# Altium PCB PCB_DC_Adapterplatine.PcbDoc
Units mm, origin at the board's own origin, x right, y up, seen from the top; angles counter-clockwise.
Board outline 70.5 x 177.5 mm, 2 copper layers (Top Copper, Bottom Copper), stack 1.64 mm thick; 70 components, 33 nets, 207 pads, 58 vias.
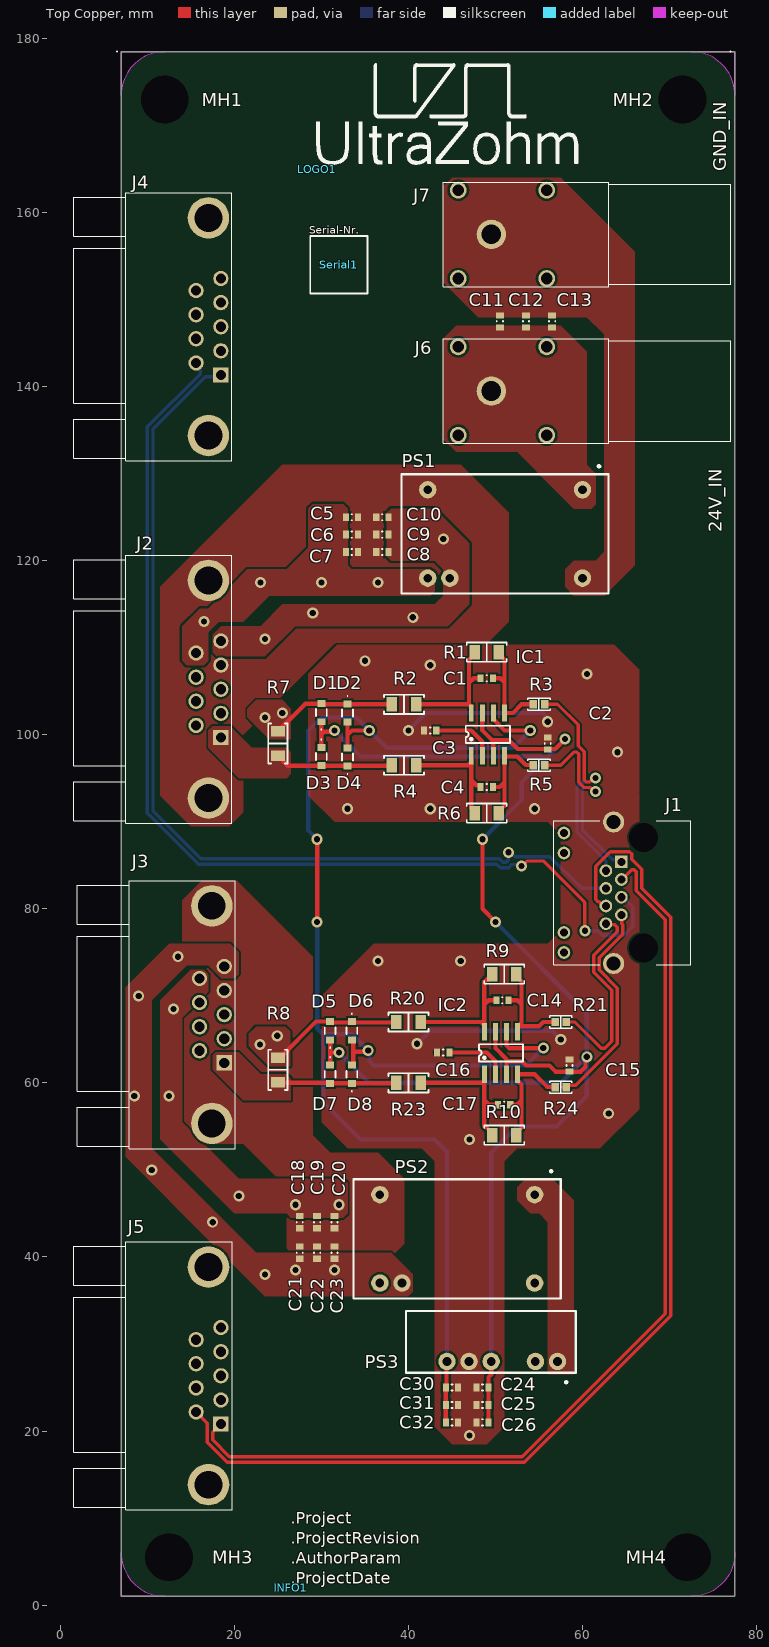
[diagram p0: Top Copper view]
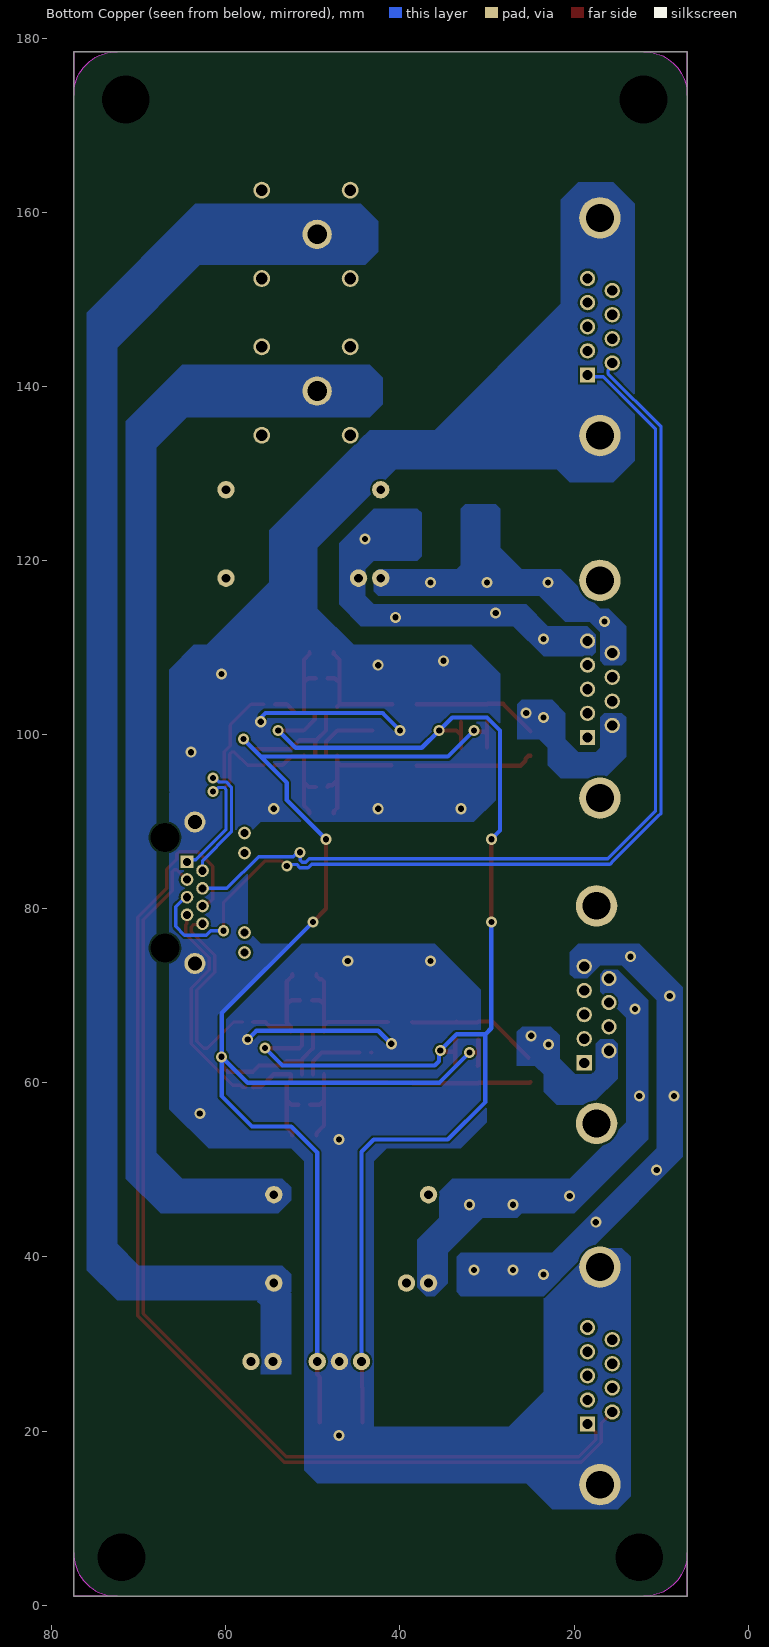
[diagram p1: Bottom Copper view, seen from below]

## Layer stack, top to bottom
Top Mask: solder mask 0.015, Solder Resist, Dk 3.8
Top Copper: signal copper 0.07
Core: core 1.5, FR-4, Dk 4.5
Bottom Copper: signal copper 0.07
Bottom Mask: solder mask 0.015, Solder Resist, Dk 3.8

## Board outline
7,1 77.5,1 77.5,178.5 7,178.5
cut-out: 77.5,173.5 ccw(c72.5,173.5) 72.5,178.5 77.5,178.5
cut-out: 7,178.5 12,178.5 ccw(c12,173.5) 7,173.5
cut-out: 7,1 7,6 ccw(c12,6) 12,1
cut-out: 72.5,1 77.5,1 77.5,6 cw(c72.5,6)

## Design rules (kind name [scope] priority, off if disabled: settings)
Clearance [All] p1: gap=0.254 ignorepadtopadclearanceinfootprint=FALSE except(0: Arc-Hole Track-Hole SMDPad-Hole THPad-Hole Via-Hole Fill-Hole Poly-Hole Region-Hole Text-Hole)
DiffPairsRouting [All] p1: maxlimit=0.254 minlimit=0.254 mostfreqgap=0.254 toplayer_minwidth=0.381 toplayer_maxwidth=0.381 toplayer_prefwidth=0.381 bottomlayer_minwidth=0.381 bottomlayer_maxwidth=0.381 bottomlayer_prefwidth=0.381 maxuncoupledlength=12.7
HoleSize [All] p1: absolutevalues=TRUE maxlimit=6.3 minlimit=0.15 maxpercent=80.000 minpercent=20.000
HoleToHoleClearance [All] p1: gap=0.5 allowstackedmicrovias=TRUE
PlaneConnect [All] p1: planeconnectstyle=Direct reliefexpansion=0.508 reliefentries=4 reliefconductorwidth=0.254 reliefairgap=0
PolygonConnect [All] p1: connectstyle=Direct reliefconductorwidth=0.254 reliefentries=4 polygonreliefangle="90 Angle" airgapwidth=0.254
RoutingVias [All] p1: holewidth=0.711 width=1.27 viastyle="Through Hole" minholewidth=0.711 minwidth=1.27 maxholewidth=0.711 maxwidth=1.27
SilkToSolderMaskClearance [IsPad] p1: minsilkscreentomaskgap=0.1 clearancetoexposedcopper=FALSE
SolderMaskExpansion [All] p1: expansion=0 istentingtop=FALSE
Width [All] p1: maxlimit=1.5 minlimit=0.254 preferedwidth=0.5
25 further rules are at their usual default settings.

## Classes and differential pairs
component class TopSheet: INFO1 J1 J2 J3 J4 J5 LOGO1 MH1 MH2 MH3 MH4 Serial1
component class "Signal Conditioning": C14 C15 C16 C17 D5 D6 D7 D8 IC2 R8 R9 R10 R20 R21 R23 R24
component class "Power Supply": C5 C6 C7 C8 C9 C10 C11 C12 C13 C18 C19 C20 C21 C22 C23 J6 J7 PS1 PS2
differential pair V_DSUB_3: +V_DSUB_3_P -V_DSUB_3_N
differential pair V_Spannung: +V_Spannung_P -V_Spannung_N
differential pair V_Strom_2: +V_Strom_2_P -V_Strom_2_N
differential pair V_Strom_1: +V_Strom_1_P -V_Strom_1_N

## Components (designator, comment, footprint, x,y, rotation, side; value= is the part's Value field where it differs from the comment)
C1 "1 pF" C_0603 48.993,106.5 r0 top
C2 "100 nF" C_0603 55.993,99 r90 top
C3 "1 µF" C_0603 42.493,100.5 r0 top
C4 "1 pF" C_0603 48.993,94 r0 top
C5 "1 µF" C_0603 33.5,125 r180 top
C6 "1 µF" C_0603 33.5,123 r180 top
C7 "1 µF" C_0603 33.5,121 r180 top
C8 "1 µF" C_0603 37,121 r180 top
C9 "1 µF" C_0603 37,123 r180 top
C10 "1 µF" C_0603 37,125 r180 top
C11 "1 µF" C_0603 50.5,147.5 r90 top
C12 "1 µF" C_0603 53.5,147.5 r90 top
C13 "1 µF" C_0603 56.5,147.5 r90 top
C14 "1 pF" C_0603 50.793,69.5 r0 top
C15 "100 nF" C_0603 58.493,62 r90 top
C16 "1 µF" C_0603 43.993,63.5 r0 top
C17 "1 pF" C_0603 50.993,57.5 r0 top
C18 "1 µF" C_0603 27.5,44 r90 top
C19 "1 µF" C_0603 29.5,44 r90 top
C20 "1 µF" C_0603 31.5,44 r90 top
C21 "1 µF" C_0603 27.5,40.5 r90 top
C22 "1 µF" C_0603 29.5,40.5 r90 top
C23 "1 µF" C_0603 31.5,40.5 r90 top
C24 "1 µF" C_0603 48.5,25 r0 top
C25 "1 µF" C_0603 48.5,23 r0 top
C26 "1 µF" C_0603 48.5,21 r0 top
C30 "1 µF" C_0603 45,25 r0 top
C31 "1 µF" C_0603 45,23 r0 top
C32 "1 µF" C_0603 45,21 r0 top
D1 "1SS356VMFHTE-17" 1SS356VMFHTE17 29.993,102.55 r180 top
D2 "1SS356VMFHTE-17" 1SS356VMFHTE17 32.993,102.5 r0 top
D3 "1SS356VMFHTE-17" 1SS356VMFHTE17 29.993,97.5 r0 top
D4 "1SS356VMFHTE-17" 1SS356VMFHTE17 32.993,97.45 r180 top
D5 "1SS356VMFHTE-17" 1SS356VMFHTE17 31,66 r180 top
D6 "1SS356VMFHTE-17" 1SS356VMFHTE17 33.5,66 r0 top
D7 "1SS356VMFHTE-17" 1SS356VMFHTE17 31,61 r0 top
D8 "1SS356VMFHTE-17" 1SS356VMFHTE17 33.5,61 r180 top
IC1 "ADA4940-1ARZ-R7" SOIC-8-N 47.223,97.6 r90 top value="differential ADC driver"
IC2 "ADA4940-1ARZ-R7" SOIC-8-N 48.723,61 r90 top value="differential ADC driver"
INFO1 "Design Information" Design_info 26.5,2 r0 top
J1 "RJHSE-5381" RJHSE-5381 72.589,73.849 r90 top
J2 "2311765-2" 23117652 18.44,99.695 r270 top
J3 "2311765-2" 23117652 18.833,62.305 r270 top
J4 "2311765-2" 23117652 18.44,141.345 r270 top
J5 "2311765-2" 23117652 18.442,20.805 r270 top
J6 "FCR7350R, PCB mount 4mm jack, RED" FCR7350 60.5,139.5 r0 top value="PCB mount 4mm jack, Red FCR7350R, 1000V, 24A"
J7 "FCR7350B, PCB mount 4mm jack, BLACK" FCR7350 60.5,157.5 r0 top value="PCB mount 4mm jack, Black	FCR7350B, 1000V, 24A"
LOGO1 "UZ Logo" UZ_Logo_small 29.5,165 r0 top value=Logo
MH1 "Mounting_Hole_M5" "Mounting Hole (M5)" 12,173 r0 top
MH2 "Mounting_Hole_M5" "Mounting Hole (M5)" 71.5,173 r0 top
MH3 "Mounting_Hole_M5" "Mounting Hole (M5)" 12.5,5.5 r0 top
MH4 "Mounting_Hole_M5" "Mounting Hole (M5)" 72,5.5 r0 top
PS1 "TEL 12-2423" "TEL 12-2423" 62.993,129.93 r180 top
PS2 "TEL 12-2423" "TEL 12-2423" 57.493,48.93 r180 top
PS3 "TMA 2405D" "TMA 2405D" 59.22,26.7 r180 top
R1 "2k 0.1%" "RES 1206_3216" 48.993,109.5 r0 top value=2k
R2 "1k 0.1%" "RES 1206_3216" 39.493,103.5 r0 top value=1k
R3 "49R9" "RES 0603_1608" 54.993,103.5 r0 top
R4 "1k 0.1%" "RES 1206_3216" 39.493,96.5 r0 top value=1k
R5 "49R9" "RES 0603_1608" 54.993,96.5 r0 top
R6 "2k 0.1%" "RES 1206_3216" 48.993,91 r0 top value=2k
R7 "10R" "RES 1206_3216" 25,99 r90 top
R8 "10R" "RES 1206_3216" 25,61.5 r90 top
R9 "2k 0.1%" "RES 1206_3216" 51,72.5 r0 top value=2k
R10 "2k 0.1%" "RES 1206_3216" 51,54 r0 top value=2k
R20 "1k 0.1%" "RES 1206_3216" 39.993,67 r0 top value=1k
R21 "49R9" "RES 0603_1608" 57.493,67 r0 top
R23 "1k 0.1%" "RES 1206_3216" 39.993,60 r0 top value=1k
R24 "49R9" "RES 0603_1608" 57.493,59.5 r0 top
Serial1 "Serialnumber 6.3 x 6.3 mm" SERIAL_6.3X6.3MM 32,154 r0 top value=REV

## Footprints (in the part's own frame and the unit in brackets; to place one, negate y for a bottom-side part, rotate by r counter-clockwise, add the part's x,y. Pads: shape width x height; smd on the part's side, far side on the other; paste and mask are expansions set on the pad)
1SS356VMFHTE17 [mm]
  rect 0.9x0.8 smd: 1(0,1.05) 2(0,-1.05)
  silkscreen extent -0.63,-0.4 0.63,2
23117652 [mm]
  rect 1.755x1.755 hole 1.17: 1(0,0)
  round 1.755 hole 1.17: 2(-2.77,0) 3(-5.54,0) 4(-8.311,0) 5(-11.081,0) 6(-1.385,-2.84) 7(-4.155,-2.84) 8(-6.925,-2.84) 9(-9.695,-2.84)
  round 4.77 hole 3.18: MH1(-18.041,-1.42) MH2(6.96,-1.42)
  silkscreen extent -20.95,-16.92 9.86,1.28, body extent -21.03,-16.93 9.78,1.27, height 12.63
C_0603 [mm] "Chip Capacitor, Body 1.6x0.8mm, Height 1.0mm, IPC High Density"
  rect 0.7x0.9 smd: 1(-0.7,0) 2(0.7,0)
  silkscreen extent -0.05,-0.35 0.05,0.35, body extent -0.87,-0.47 0.88,0.48, height 1
Design_info [mm] "Design information about the PCB"
FCR7350 [mil]
  round 132.87 hole 88.58: 1(-432.22,0)
  round 76.5 hole 53.15: 2(-581.83,200) 3(-581.83,-200) 4(-181.83,-200) 5(-181.83,200)
  silkscreen extent -649,-236 652,236, body extent -648,-236 651,236, height 485
"Mounting Hole (M5)" [mm]
  round 5 hole 5.5: ""(0,0)
"RES 0603_1608" [mm] "Chip Resistor, 2-Leads, Body 1.60x0.80mm, IPC Medium Density"
  rect 0.85x0.95 smd: 1(-0.65,0) 2(0.65,0)
  silkscreen extent -1.27,-0.7 1.27,0.7, body extent -0.8,-0.4 0.8,0.4, height 0.45
"RES 1206_3216" [mm] "Chip Resistor, 2-Leads, Body 3.13x1.55mm, IPC Medium Density"
  rect 1.2x1.65 smd: 1(-1.4,0) 2(1.4,0)
  silkscreen extent -2.3,-1.1 2.3,1.1, body extent -1.6,-0.8 1.6,0.8, height 0.6
RJHSE-5381 [mm] "Ethernet-Steckverbinder R/A RJ45 SHIELDED 8 CONT Y/G LEDS"
  rect 1.462x1.462 hole 0.94: 1(11.552,8.129)
  round 1.462 hole 0.94: 2(10.537,9.909) 3(9.522,8.129) 4(8.507,9.909) 5(7.492,8.129) 6(6.478,9.909) 7(5.462,8.129) 8(4.447,9.909) 9(14.86,14.729) 10(12.569,14.729) 11(3.43,14.729) 12(1.139,14.729)
  round 2.43 hole 1.62: MH1(16.13,9.019) MH2(-0.131,9.019)
  round 1.65 hole 3.3 unplated: MH3(14.35,5.589) MH4(1.65,5.589)
  silkscreen extent -0.26,0.13 16.26,15.88, body extent -0.28,-0.51 16.28,15.93, height 14.74
SERIAL_6.3X6.3MM [mm]
  silkscreen extent -3.3,-3.3 3.3,3.3
SOIC-8-N [mm] "SMD Small Outline IC 8 pin Narrow"
  rect 2x0.55 smd: 1(0,0) 2(0,-1.27) 3(0,-2.54) 4(0,-3.81) 5(4.9,-3.81) 6(4.9,-2.54) 7(4.9,-1.27) 8(4.9,0)
  silkscreen extent 1.46,-4.44 3.44,0.64, body extent -0.64,-4.32 5.56,0.51, height 1.7
"TEL 12-2423" [mm] "Isolierte DC/DC-Wandler – Durchsteckmontage 18-36Vin+/-15V 400mA 12W DIP Iso"
  round 2 hole 1: 1(3,1.77) 8(20.78,1.77) 9(20.78,11.93) 10(18.24,11.93) 16(3,11.93)
  silkscreen extent 0,-0.94 23.8,13.7, body extent 0,0 23.75,13.75, height 8.2
"TMA 2405D" [mm] "Isolierte DC/DC-Wandler – Durchsteckmontage Product Type: DC/DC; Package Style: SIP; Output Power (W): 1; Input Voltage: 24 VDC +/-10%; Output 1 (Vdc): 5; Output 2 (Vdc): -5; Output 3 (Vdc): N/A"
  round 2 hole 1: 1(2.1,-1.3) 2(4.64,-1.3) 4(9.72,-1.3) 5(12.26,-1.3) 6(14.8,-1.3)
  silkscreen extent 0,-7.1 19.5,1.1, body extent 0.08,-7.12 19.5,-0.08, height 11.1
UZ_Logo_small [mm] "logo width 3cm"
  silkscreen extent -0.05,0.57 29.94,12.12

## Part data
C1 C4 C14 C17: library part KGM15ACG1H1R0BT, "Multilayer Ceramic Capacitors MLCC - SMD/SMT 50V 1pF C0G 0603 +/-.1pF", Device Package=0603, Manufacturer="KYOCERA AVX", Operating Temperature="-55 to +125°C", Supplier Part Number 1=581-KGM15ACG1H1R0BT, Tolerance=10%, Voltage Rating="50 VDC", Component Type="Capacitor 0603", ComponentLink1Description=Datasheet, ComponentLink1URL=https://www.mouser.de/datasheet/2/40/C0GNP0_KGM-3216332.pdf, Created from=TGaupp, Created On="13.02.2024 08:51:22", Last Updated="13.02.2024 08:51:22", Live Cycle Status=1, Manufacturer Part Number=KGM15ACG1H1R0BT, Mounting Type=SMD, PartID=147, Series=C0G, Supplier 1=Mouser, Type=Capacitor
C2 C15: library part C0603C104K9PACTU, "Capacitor 0603, 6.3 VDC, 100 nF, X5R", Device Package=0603, Manufacturer=KEMET, Operating Temperature="-55 - 85°C", Supplier Part Number 1=80-C0603C104K9P, Tolerance="10 %", Voltage Rating="6.3 VDC", Component Type="Capacitor 0603", ComponentLink1Description=Datasheet, ComponentLink1URL=https://www.mouser.de/datasheet/2/212/KEM_C1006_X5R_SMD-1103249.pdf, Created from=MGremer, Created On="20.12.2020 13:54:13", Last Updated="20.01.2021 13:57:36", Live Cycle Status=1, Manufacturer Part Number=C0603C104K9PACTU, Mounting Type=SMD, PartID=70, Series="SMD Comm X5R", Stock number="not stored", Supplier 1=Mouser, Type=Capacitor
C3 C5 C6 C7 C8 C9 C10 C11 C12 C13 C16 C18 C19 C20 C21 C22 C23 C24 C25 C26 C30 C31 C32: library part CL10A105KB8NNNC, "50V 1uF X5R ±10% 0603  Multilayer Ceramic Capacitors MLCC - SMD/SMT ROHS", Device Package=0603, LCSC Part Number=C15849, Manufacturer="Samsung Electro-Mechanics", Operating Temperature="-55 - 85°C", Tolerance="10 %", Voltage Rating="50 VDC", Component Type="Capacitor 0603", ComponentLink1Description=Datasheet, ComponentLink1URL=https://datasheet.lcsc.com/lcsc/1810261812_Samsung-Electro-Mechanics-CL10A105KB8NNNC_C15849.pdf, Created from=MGremer, Created On="20.12.2020 13:54:13", Last Updated="28.11.2022 17:23:01", Live Cycle Status=1, Manufacturer Part Number=CL10A105KB8NNNC, Mounting Type=SMD, PartID=5, Series=M, Stock number="Labor SMD Container", Supplier 1=LCSC, Supplier Part Number 1=C15849, Type=Capacitor
D1 D2 D3 D4 D5 D6 D7 D8: "Diode", Manufacturer_Name="ROHM Semiconductor", Mouser Part Number=755-1SS356VMFHTE-17, Datasheet Link=https://fscdn.rohm.com/en/products/databook/datasheet/discrete/diode/switching/1ss355vmfhte-17-e.pdf, Height=0.9mm, Manufacturer_Part_Number=1SS356VMFHTE-17, Mouser Price/Stock=https://www.mouser.co.uk/ProductDetail/ROHM-Semiconductor/1SS356VMFHTE-17?qs=doiCPypUmgG12xHjyvfQdg%3D%3D, Supplier 1=Mouser, Supplier Part Number 1=755-1SS356VMFHTE-17
IC1 IC2: "Differential ADC Driver", Device Package=SOIC-8, Manufacturer="Analog Devices", Operating Temperature="-40 - 105 °C", Package Reference=SOIC-N-8, Supplier Part Number 1=584-ADA4940-1ARZ-R7, Best.-Nr.="Farnell 209-6178", Channels=1, Class I=Analog, Class II="Fully Differential ADC Drivers (-40-125°C)", Component Type=ADC, ComponentLink1Description=Datasheet, ComponentLink1URL=https://www.mouser.de/datasheet/2/609/ADA4940-1_4940-2-878284.pdf, Created from=MGremer, Created On="15.01.2021 12:16:53", Datasheet="DSO11449, Ver. Aug 2000", Last edited="04.01.2007 10:14", Last Updated="22.11.2021 15:19:18", Live Cycle Status=1, Manufacturer Part Number=ADA4940-1ARZ-R7, Mounting Type=SMD, PartID=3, Resolution=-, Stock number="not stored", Supplier 1=Mouser, Type=ADC
INFO1: "Design InformationS", Manufacturer=UltraZohm, Supplier Part Number 1=-, Component Type="Design Information", ComponentLink1Description=https://docs.ultrazohm.com/, ComponentLink1URL=homepage, Created from=MGremer, Created On="03.11.2021 09:04:23", Last Updated="03.11.2021 09:28:34", Live Cycle Status=1, Manufacturer Part Number="Design Information", PartID=12, Supplier 1=-, Type="Design Information"
J1: "Connector Ethernet R/A RJ45 SHIELDED 8 CONT Y/G LEDS"
J2 J3 J4 J5: "Connector D-Sub 9 Pin Female", Manufacturer_Name="TE Connectivity", Mouser Part Number=571-2311765-2, Arrow Part Number=2311765-2, Arrow Price/Stock=https://www.arrow.com/en/products/2311765-2/te-connectivity?region=nac, Datasheet Link=https://www.te.com/commerce/DocumentDelivery/DDEController?Action=showdoc&DocId=Customer+Drawing%7F2311765%7FD%7Fpdf%7FEnglish%7FENG_CD_2311765_D.pdf%7F2311765-2, Height=12.8mm, Manufacturer_Part_Number=2311765-2, Mouser Price/Stock=https://www.mouser.co.uk/ProductDetail/TE-Connectivity/2311765-2?qs=rrS6PyfT74frdzrH7SJRfg%3D%3D
J6: library part FCR7350R, "FCR7350B, 1000V, 24A, RED", Device Package=THT, Manufacturer=Cliff, Operating Temperature="-40°C - 80°C", Supplier Part Number 1=3185-FCR7350R-ND, Component Type="PCB mount 4mm jack, Red", ComponentLink1Description=datasheet, ComponentLink1URL=https://www.cliffuk.co.uk/products/testleads/sockets/S16NPC.pdf, ComponentLink2Description=drawing, ComponentLink2URL=https://media.digikey.com/pdf/Data%20Sheets/Cliff%20Electronic%20LTD%20PDF's/FCR7350_Drawing.pdf, Created from=DHufnagel, Created On="13.06.2022 10:18:11", Last Updated="28.06.2022 13:58:37", Live Cycle Status=1, Manufacturer Part Number=FCR7350R, Minimum Order=1, Mounting Type=THT, PartID=7, Series=S16N-PC, Stock number="not stored", Supplier 1=Digi-Key, Supplier 2=farnell, Supplier Part Number 2=1854508, Type="PCB mount 4mm jack, Red FCR7350R, 1000V, 24A"
J7: library part FCR7350B, "FCR7350B, 1000V, 24A, BLACK", Device Package=THT, Manufacturer=Cliff, Operating Temperature="-40°C - 80°C", Supplier Part Number 1=3185-FCR7350B-ND, Component Type="PCB mount 4mm jack, Black", ComponentLink1Description=datasheet, ComponentLink1URL=https://www.cliffuk.co.uk/products/testleads/sockets/S16NPC.pdf, ComponentLink2Description=drawing, ComponentLink2URL=https://media.digikey.com/pdf/Data%20Sheets/Cliff%20Electronic%20LTD%20PDF's/FCR7350_Drawing.pdf, Created from=DHufnagel, Created On="13.06.2022 10:18:11", Last Updated="28.06.2022 13:58:37", Live Cycle Status=1, Manufacturer Part Number=FCR7350B, Minimum Order=1, Mounting Type=THT, PartID=6, Series=S16N-PC, Stock number="not stored", Supplier 1=Digi-Key, Supplier 2=farnell, Supplier Part Number 2=1854507, Type="PCB mount 4mm jack, Black	FCR7350B, 1000V, 24A"
LOGO1: library part "Logo small", Manufacturer=UltraZohm, Supplier Part Number 1=-, Component Type=Logo, ComponentLink1Description=https://docs.ultrazohm.com/, ComponentLink1URL=homepage, Created=Jan2021_Liegmann, Created from=MGremer, Created On="03.11.2021 09:04:23", Last Updated="03.11.2021 09:05:50", Live Cycle Status=1, Manufacturer Part Number="Logo small", PartID=10, Supplier 1=-, Type=Logo
MH1 MH2 MH3 MH4: "Mounting Hole"
PS1 PS2: "Isolierte DC/DC-Wandler – Durchsteckmontage 18-36Vin+/-15V 400mA 12W DIP Iso", Supplier Part Number 1=490-PGNM1-S24-S5-S, Supplier 1=Mouser
PS3: "Isolierte DC/DC-Wandler – Durchsteckmontage Product Type: DC/DC; Package Style: SIP; Output Power (W): 1; Input Voltage: 24 VDC +/-10%; Output 1 (Vdc): 5; Output 2 (Vdc): -5; Output 3 (Vdc): N/A", Supplier Part Number 1=490-PGNM1-S24-S5-S, Supplier 1=Mouser
R1 R6 R9 R10: library part TNPW12062K00BEEA, "SMD resistor 2Kohms .1% 400mW 25ppm", Device Package=1206, Manufacturer=Vishay, Supplier Part Number 1=71-TNPW12062K00BEEA, Tolerance=0.1%, Component Type="SMD resistor", ComponentLink1Description=Datasheet, ComponentLink1URL=https://www.vishay.com/docs/28758/tnpw_e3.pdf, Created from=TGaupp, Created On="12.02.2024 09:48:36", Last Updated="12.02.2024 09:48:36", Live Cycle Status=1, Manufacturer Part Number=TNPW12062K00BEEA, Mounting Type=SMD, PartID=323, Stock number="not stored", Supplier 1=Mouser, Type=Resistor
R2 R4 R20 R23: library part ERA-8AEB102V, "SMD resistor 1/4W 1.0Kohm 0.1% 25ppm", Device Package=1206, LCSC Part Number=C2079586, Manufacturer=Panasonic, Supplier Part Number 1=667-ERA-8AEB102V, Tolerance=0.1%, Component Type="SMD resistor", ComponentLink1Description=Datasheet, ComponentLink1URL=https://www.mouser.de/datasheet/2/315/AOA0000C307-1149632.pdf, Created from=TGaupp, Created On="08.08.2023 13:03:51", Last Updated="08.08.2023 13:03:51", Live Cycle Status=1, Manufacturer Part Number=ERA-8AEB102V, Mounting Type=SMD, PartID=292, Stock number="not stored", Supplier 1=Mouser, Type=Resistor
R3 R5 R21 R24: library part RC0603FR-0749R9L, "100mW Thick Film Resistors ±100ppm/℃ ±1% 49.9Ω 0603 Chip Resistor - Surface Mount ROHS", Device Package=0603, LCSC Part Number=C114625, Manufacturer=YAGEO, Tolerance=1%, Component Type="SMD resistor", ComponentLink1Description=Datasheet, ComponentLink1URL=https://datasheet.lcsc.com/lcsc/2304140030_YAGEO-RC0603FR-0749R9L_C114625.pdf, Created from=AGeiger, Created On="14.06.2023 17:42:26", Last Updated="14.06.2023 17:42:26", Live Cycle Status=1, Manufacturer Part Number=RC0603FR-0749R9L, Mounting Type=SMD, PartID=277, Supplier 1=LCSC, Supplier Part Number 1=C114625, Type=Resistor
R7 R8: library part SG73G2BTTD10R0D, "SMD 10 ohm 0.5% 0.5W", Device Package=1206, Manufacturer="KOA Speer", Supplier Part Number 1=660-SG73G2BTTD10R0D, Tolerance=0.5%, Component Type="SMD resistor", ComponentLink1Description=Datasheet, ComponentLink1URL=https://www.koaspeer.com/pdfs/SG73G.pdf, Created from=TGaupp, Created On="13.03.2024 10:06:45", Last Updated="13.03.2024 10:06:45", Live Cycle Status=1, Manufacturer Part Number=SG73G2BTTD10R0D, Mounting Type=SMD, PartID=329, Stock number="not stored", Supplier 1=Mouser, Type=Resistor
Serial1: library part "Serial Number", "Serial Number", Manufacturer=UltraZohm, Supplier Part Number 1=-, Component Type="Serial Number", ComponentLink1Description=https://docs.ultrazohm.com/, ComponentLink1URL=homepage, Created=2018_09_18_AGeiger, Created from=MGremer, Created On="03.11.2021 09:04:23", Last Updated="03.11.2021 09:28:34", Live Cycle Status=1, Manufacturer Part Number="Serial Number", PartID=11, Supplier 1=-, Type="Serial Number"

## Via types
v1: diameter 1.27, hole 0.711, Top Copper to Bottom Copper, 58 vias

## Nets (pads, with @x,y where several pads share a name; then routed paths per layer and width w, separated by ;. In a path a pad name is that pad's centre, name@x,y a point inside that pad or via, vN(x,y) a via of type N, cw(c..) or ccw(c..) an arc to the next point about the centre after c; other vN are vias at no path point)
24V_IN: C11.1 C12.1 C13.1 J6.1 PS1.1 PS2.1 PS3.1
+5V: C2.1 C15.1 C24.2 C25.2 C26.2 D1.1 D3.1 D5.1 D7.1 IC1.3 IC1.7 IC2.3 IC2.7 PS3.4 | length 191.3
  Top Copper w0.5: D3.1 29.993,100.025 ; D1.1 29.993,100.025 ; D5.1 31,63.5 ; D7.1@31.094,61.956 D7.1 31,63.5 ; v1(31.493,100.5) 31.345,100.353 30.32,100.353 29.993,100.025 ; v1(32,63.5) 31,63.5 ; IC1.7 48.493,100.505 49.493,99.505 49.493,99.5 49.738,99.255 49.738,97.625 IC1.3 ; v1(48.5,88) 48.5,80 v1(50,78.5) ; C26.2 C25.2 C24.2 49.2,26.2 49.5,26.5 PS3.4 ; 49.615,99.381 51.53,99.381 52.55,98.361 56.854,98.361 v1(57.993,99.5) ; IC2.7 49.993,64 51.263,62.73 51.263,62.504 ; IC2.3 51.263,62.504 ; v1(60.493,63) 60.345,62.853 60.345,61.853 59.793,61.3 C15.1 56.893,61.3 56.193,62 53.52,62 53.016,62.504 51.263,62.504
  Bottom Copper w0.5: v1(31.493,100.5) 34.493,97.5 55.815,97.5 ; v1(32,63.5) 35.5,60 57.493,60 v1(60.493,63) ; v1(48.5,88) 53,92.5 53,94.507 55.904,97.411 v1(57.993,99.5) ; PS3.4 49.5,52 52.5,55 57,55 60.493,58.493 v1(60.493,63) ; v1(50,78.5) 60.493,68.007 v1(60.493,63)
+15V_1: C5.2 C6.2 C7.2 J2.9 PS1.9
  other v1: 16.5,113 23,117.5 30,117.5 36.5,117.5
+15V_2: C18.2 C19.2 C20.2 J3.9 PS2.9
  other v1: 27,46 32,46 20.5,47 12.5,58.5 13,68.5
-5V: C30.1 C31.1 C32.1 D2.2 D4.2 D6.2 D8.2 IC1.6 IC2.6 PS3.6 | length 169.7
  Top Copper w0.5: v1(29.5,78.5) v1(29.5,88) ; D4.2 32.993,99.975 ; D2.2 32.993,99.975 ; D8.2 33.639,62.189 33.639,63.585 ; D6.2 33.639,64.811 33.639,63.585 ; v1(35.366,63.732) 35.219,63.585 33.639,63.585 ; v1(35.493,100.5) 33.518,100.5 32.993,99.975 ; C32.1 C31.1 C30.1 44.36,25.06 44.36,27.94 PS3.6 ; IC1.6 49.788,102.475 49.788,101.75 51.038,100.5 v1(53.993,100.5) ; IC2.6 51.263,64.293 51.555,64 v1(55.493,64)
  Bottom Copper w0.5: v1(29.5,78.5) 29.5,66.292 30.188,65.604 ; v1(29.5,88) 28.5,89 28.5,100.5 29.993,101.993 34,101.993 v1(35.493,100.5) 37.493,98.5 51.993,98.5 v1(53.993,100.5) ; PS3.6 44.42,52.08 43,53.5 34.5,53.5 30.188,57.813 30.188,65.604 ; v1(55.493,64) 53.493,62 36,62 35.513,62.487 35.513,63.585 v1(35.366,63.732) 33.494,65.604 30.188,65.604
-15V_1: C8.1 C9.1 C10.1 J2.5 PS1.10
  other v1: 23.5,111 40.5,113.5 29,114 44,122.5
-15V_2: C21.1 C22.1 C23.1 J3.5 PS2.10
  other v1: 23.5,38 27,38.5 31.5,38.5 17.5,44 10.5,50 8.5,58.5 9,70 13.5,74.5
GND: C2.2 C3.1 C15.2 C16.1 C24.1 C25.1 C26.1 C30.2 C31.2 C32.2 J1.MH1 J1.MH2 J4.MH1 J4.MH2 J5.MH1 J5.MH2 PS3.5 | length 35
  Bottom Copper w0.5: v1(39.993,100.5) 41.993,102.5 55.448,102.5 55.845,102.103 55.845,101.647 v1(55.993,101.5) ; v1(40.993,64.5) 42.493,66 56.493,66 v1(57.493,65)
  other v1: 47,19.5 47,53.5 63,56.5 36.5,74 46,74 33,91.5 42.5,91.5 54.5,91.5 64,98 60.5,107 42.5,108 35,108.5
GND_1: C5.1 C6.1 C7.1 C8.2 C9.2 C10.2 J2.4 J2.MH1 J2.MH2 PS1.8
GND_2: C18.1 C19.1 C20.1 C21.2 C22.2 C23.2 J3.4 J3.MH1 J3.MH2 PS2.8
GND_IN: C11.2 C12.2 C13.2 J7.1 PS1.16 PS2.16 PS3.2
NetC1_1: C1.1 IC1.8 R1.1 R2.2 | length 14.3
  Top Copper w0.5: R2.2 46.948,103.5 ; IC1.8@47.223,103.225 46.948,103.5 ; R1.1 47.593,109.275 46.948,108.63 46.948,105.955 ; C1.1 48.285,106.493 47.485,106.493 46.948,105.955 ; 46.948,103.5 46.948,105.955
NetC1_2: C1.2 IC1.5 R1.2 R3.1 | length 12.5
  Top Copper w0.5: C1.2 50.533,106.5 51.033,106 ; R1.2 50.393,109.275 51.033,108.635 51.033,106 ; R3.1 52.993,103.5 51.993,102.5 IC1.5 51.033,106
NetC3_2: C3.2 IC1.2 | length 7.4
  Top Copper w0.5: C3.2 47.2,100.5 48.493,99.207 IC1.2
NetC4_1: C4.1 IC1.1 R4.2 R6.1 | length 14.6
  Top Copper w0.5: R4.2@40.993,96.5 46.848,96.5 IC1.1@47.223,96.875 ; IC1.1 IC1.1@47.223,96.875 ; R6.1 47.593,91.225 47.223,91.595 47.223,94.77 ; C4.1 48.293,94.1 48.193,94.2 47.793,94.2 47.223,94.77 ; 47.223,94.77 47.223,95.5 IC1.1@47.223,96.875
NetC4_2: C4.2 IC1.4 R5.1 R6.2 | length 12.2
  Top Copper w0.5: C4.2 50.493,94 51.033,94.54 ; R6.2 50.393,91.225 51.033,91.865 51.033,94.54 ; IC1.4 IC1.4@51.033,97.525 ; R5.1 54.31,96.532 53.46,96.532 52.493,97.5 51.058,97.5 IC1.4@51.033,97.525 ; 51.033,94.54 IC1.4@51.033,97.525
NetC14_1: C14.1 IC2.8 R9.1 R20.2 | length 16.2
  Top Copper w0.5: R20.2 48.348,67 IC2.8@48.723,66.625 ; IC2.8 IC2.8@48.723,66.625 ; R9.1@49.593,72.5 49.593,72.275 49.243,71.925 49.015,71.925 48.723,71.632 48.723,69 ; C14.1 49.223,69.5 48.723,69 ; IC2.8@48.723,66.625 48.723,69
NetC14_2: C14.2 IC2.5 R9.2 R21.1 | length 13
  Top Copper w0.5: C14.2 52.493,69.5 52.993,69 ; R9.2@52.393,72.5 52.393,72.275 52.993,71.675 52.993,69 ; IC2.5 52.533,66.475 52.558,66.5 54.993,66.5 55.493,67 R21.1 ; IC2.5@52.7,66.65 52.993,66.943 52.993,69
NetC16_2: C16.2 IC2.2 | length 7.2
  Top Copper w0.5: C16.2 48.993,63.5 49.993,62.5 IC2.2
NetC17_1: C17.1 IC2.1 R10.1 R23.2 | length 16.6
  Top Copper w0.5: R23.2 48.448,60 IC2.1@48.723,60.275 ; IC2.1 IC2.1@48.723,60.275 ; R10.1@49.593,54 49.593,54.225 48.723,55.095 48.723,58 ; C17.1 49.223,57.5 48.723,58 ; 48.723,58 IC2.1@48.723,60.275
NetC17_2: C17.2 IC2.4 R10.2 R24.1 | length 13.9
  Top Copper w0.5: C17.2 52.493,57.5 52.993,58 ; R10.2@52.393,54 52.393,54.225 52.993,54.825 52.993,58 ; R24.1@56.854,59.5 56.822,59.532 55.96,59.532 54.493,61 IC2.4 52.533,60.525 52.558,60.5 52.558,60.25 52.993,59.815 52.993,58
NetD1_2: D1.2 D2.1 J2.6 R2.1 R7.2 | length 14.4
  Top Copper w0.5: R7.2 28.15,103.55 29.968,103.55 29.993,103.525 32.468,103.525 32.493,103.5 R2.1
  other v1: 23.5,102 25.5,102.5
NetD3_2: D3.2 D4.1 J2.1 R4.1 R7.1 | length 13.7
  Top Copper w0.5: R7.1 25.225,97.6 25.575,97.25 25.575,97.025 26.15,96.45 D3.2 32.993,96.45 R4.1@38.093,96.45
NetD5_2: D5.2 D6.1 J3.6 R8.2 R20.1 | length 15.2
  Top Copper w0.5: R8.2@25.225,62.9 29.375,67.05 D5.2 31.1,66.95 33.4,66.95 D6.1 33.6,66.95 38.543,66.95 R20.1
  other v1: 22.921,64.411 24.921,65.411
NetD7_2: D7.2 D8.1 J3.1 R8.1 R23.1 | length 13.7
  Top Copper w0.5: R8.1 25.075,60.025 30.925,60.025 D7.2 38.543,59.95 R23.1
V_DSUB_3_N: J1.5 J4.6 | length 123.1
  Top Copper w0.381: v1(53,84.921) 53.088,84.921 53.668,85.5 55.5,85.5 60.266,80.734 v1(60.266,77.485)
  Bottom Copper w0.381: J4.6 15.6,142.358 16.106,141.852 16.106,141.504 10,135.398 10,91 10.372,90.628 15.493,85.507 15.865,85.135 50.161,85.135 50.562,84.734 51.504,84.734 51.873,85.103 52.577,85.103 52.759,84.921 v1(53,84.921) ; v1(60.266,77.485) 61.762,77.485 62.262,76.985 64.766,76.985 65.766,77.985 65.766,80.25 J1.5@64.546,81.47
V_DSUB_3_P: J1.4 J4.1 | length 111.4
  Bottom Copper w0.381: J4.1 18.227,141.132 16.632,141.132 10.635,135.135 10.635,91.263 16.128,85.77 50.424,85.77 50.825,85.369 51.241,85.369 51.464,85.592 51.464,86.464 v1(51.5,86.5) 51.741,86.5 52.241,86 56.251,86 59.894,82.357 J1.4
V_Spannung_N: J1.6 J5.6 | length 130.5
  Top Copper w0.381: J5.6@15.725,22.067 J5.6 16.874,20.918 16.874,18.72 19.17,16.423 53.321,16.423 62.036,25.138 69.949,33.051 70.135,33.237 70.135,79.031 66.806,82.36 66.806,84.523 65.636,85.694 65.636,86.317 65.375,86.578 63.208,86.578 61.504,84.874 61.504,81.091 61.774,80.821 61.893,80.821 62.387,80.327 J1.6
V_Spannung_P: J1.3 J5.1 | length 116.2
  Top Copper w0.381: J5.1 17.509,19.872 17.509,18.983 19.433,17.058 53.058,17.058 69.5,33.5 69.5,78.768 66.171,82.097 66.171,84.26 65.948,84.483 65.632,84.483 64.521,83.372 J1.3
V_Strom_1_N: J1.2 R3.2 | length 26.5
  Top Copper w0.381: R3.2 57.121,103.5 59.493,101.129 59.493,98.755 60.187,98.06 60.187,94.803 60.41,94.579 60.825,94.579 61.269,95.024 v1(61.493,95.024)
  Bottom Copper w0.381: v1(61.493,95.024) 61.269,95.024 60.825,94.579 59.953,94.579 59.358,93.984 59.358,88.84 62.684,85.513 62.684,84.597 J1.2@62.766,84.515
V_Strom_1_P: J1.1 R5.2 | length 22.7
  Top Copper w0.381: R5.2 57.493,96.5 59.013,98.021 59.329,98.021 59.552,97.797 59.552,94.54 60.147,93.944 60.825,93.944 61.269,93.5 v1(61.493,93.5)
  Bottom Copper w0.381: v1(61.493,93.5) 61.269,93.5 60.825,93.944 60.216,93.944 59.993,93.721 59.993,89.103 63.467,85.629 64.447,85.629 J1.1@64.546,85.53
V_Strom_2_N: J1.8 R21.2 | length 23.5
  Top Copper w0.381: R21.2@58.038,67 R21.2 59.121,67 62.149,63.972 62.567,63.972 63.358,64.763 63.358,70.642 61.275,72.725 61.275,74.669 63.97,77.364 63.97,77.902 63.668,78.205 62.772,78.205 J1.8
V_Strom_2_P: J1.7 R24.2 | length 25.2
  Top Copper w0.381: 57.712,59.5 R24.2 58.376,59.734 59.226,59.734 63.993,64.5 63.993,70.905 61.91,72.988 61.91,74.406 64.605,77.101 64.605,78.165 64.499,78.271 64.499,79.273 J1.7
pads on no net: J1.9 J1.10 J1.11 J1.12 J1.MH3 J1.MH4 J2.2 J2.3 J2.7 J2.8 J3.2 J3.3 J3.7 J3.8 J4.2 J4.3 J4.4 J4.5 J4.7 J4.8 J4.9 J5.2 J5.3 J5.4 J5.5 J5.7 J5.8 J5.9 J6.2 J6.3 J6.4 J6.5 J7.2 J7.3 J7.4 J7.5 MH1. MH2. MH3. MH4.

## Polygon pours and split planes (outlines as drawn)
GND on Top Copper "Top Copper-GND" (solid, remove dead copper, pour order 105): 43,20.5 45,18.5 49,18.5 51,20.5 51,28.5 51,51 52.5,52.5 61.993,52.5 66.493,57 66.493,71 66.493,93.5 62.993,90 66.493,93.5 66.493,107.5 63.668,110.325 31.825,110.325 28.5,107 28.5,93 31.5,90 55.993,90 57.493,88.5 57.493,77.5 55.993,76 36,76 30.014,70.014 30.014,55.486 33,52.5 41.5,52.5 43,51 43,28.5
GND_2 on Top Copper "GND_2_L01_P127" (solid, pour order 127): 14,81 14,55 16,53 21,53 26,48 26,41 26.5,40.5 38.5,40.5 39.5,41.5 39.5,49 36.5,52 31,52 29,54 29,74.5 20.25,83.25 16.25,83.25
GND_1 on Top Copper "GND_1_L01_P121" (solid, remove dead copper, pour order 121): 11.5,117 11.5,93 15,89.5 19.39,89.5 21,91.11 21,100 31.5,110.5 49,110.5 51.5,113 51.5,125.5 46,131 25.5,131
24V_IN on Top Copper "Bottom Layer-24V_IN" (solid, pour order 33): 57,127.993 58.993,126 60.993,126 61.493,126.5 61.493,130.007 60.5,131 60.5,144 57.5,147 45.5,147 44.022,145.522 44.022,133.978 45.5,132.5 49.493,132.5 52.493,132.5
GND_IN on Top Copper "Bottom Layer-GND_IN" (solid, pour order 34): 44.022,151.978 48,148 48.493,148 60.5,148 62.5,146 62.5,121.007 61.493,120 58.993,120 57.993,119 57.993,117 58.993,116 62.5,116 65.993,119.493 65.993,155.507 57.5,164 45,164 44.022,163.022
24V_IN on Top Copper "24V_IN_L01_P062" (solid, pour order 62): 56,26.5 59,26.5 59,46.5 56.5,49 53.5,49 52.5,48 52.5,46.5 54,45 55,45 56,44
-15V_1 on Top Copper "-15V_1_L01_P083" (solid, pour order 83): 17.5,109.5 17.5,111.5 18.5,112.5 23,112.5 25.5,115 43,115 44,116 44,119 43,120 38,120 37.5,120.5 37.5,125.5 38,126 43,126 47,122 47,115 44.5,112.5 27,112.5 23.5,109 18,109
+15V_1 on Top Copper "+15V_1_L01_P085" (solid, pour order 85): 17,108.5 16.5,108 14.75,108 14.5,108 14,108.5 14,112.5 16,114.5 17,114.5 21.5,119 26,119 28.5,121.5 28.5,126 29,126.5 32.5,126.5 33,126 33,119.5 33.5,119 42.5,119 43,118.5 43,116.5 42.5,116 24,116 21,113 18.189,113 16.997,111.808 17,111.805
+15V_2 on Top Copper "+15V_2_L01_P099" (solid, pour order 99): 15,73 16.5,73 17,72.5 17,70.5 14,67.5 14,55.5 20.5,49 32.5,49 33,48.5 33,45 32.5,44.5 26.5,44.5 26,45 20,45 11.5,53.5 11.5,69.5
-15V_2 on Top Copper "Top Copper--15V_2" (solid, pour order 102): 7.5,51.5 21.5,37.5 23.5,35.5 40,35.5 40.5,36 40.5,38 38,40.5 22.5,40.5 10.5,52.5 10.5,69.5 14.5,73.5 17,73.5 18.5,72 20,72 20.5,72.5 20.5,75 19.5,76 12.5,76 7.5,71
NetD3_2 on Top Copper "NETD3_2_L01_P112" (solid, pour order 112): 17,100.5 17.5,101 19.5,101 22,98.5 26,98.5 26.5,98 26.5,95.5 26,95 20.5,95 17,98.5
NetD1_2 on Top Copper "NETD1_2_L01_P113" (solid, pour order 113): 21.5,103 22.5,104 25.5,104 26.5,103 26.5,99.5 24,99.5 21.5,102
NetD7_2 on Top Copper "NETD7_2_L01_P115" (solid, pour order 115): 17.5,63.17 17.855,63.525 20.475,63.525 23,61 26,61 26.5,60.5 26.5,58 21,58 17.5,61.5
NetD5_2 on Top Copper "NETD5_2_L01_P116" (solid, pour order 116): 21.645,65.635 22.485,66.475 25.857,66.475 26.421,65.911 26.421,61.911 23.921,61.911 21.645,64.187
GND on Bottom Copper (solid, remove dead copper, pour order 126): 13.5,12.5 15,11 22.5,11 25.5,14 49.5,14 51,15.5 51,20.5 51,28.5 51,51 52.5,52.5 61.993,52.5 66.493,57 66.493,71 66.493,93.5 62.993,90 66.493,93.5 66.493,107.5 63.668,110.325 62.175,110.325 55,117.5 55,123.5 43.5,135 36,135 21.5,149.5 21.5,161.5 19.5,163.5 15.5,163.5 13,161 13,131.5 15.5,129 20.5,129 22,130.5 40.5,130.5 49.5,121.5 49.5,114.5 45.325,110.325 31.825,110.325 28.5,107 28.5,93 31.5,90 55.993,90 57.493,88.5 57.493,77.5 55.993,76 36,76 30.014,70.014 30.014,55.486 33,52.5 41.5,52.5 43,51 43,28.5 43,20.5 27.5,20.5 23.5,24.5 23.5,37.5 20,41 14.5,41 13.5,40
GND_IN on Bottom Copper "GND_IN_L02_P059" (solid, pour order 59): 53.5,39 52.5,38 52.5,36 53.5,35 72.5,35 76,38.5 76,148.5 63.5,161 44.5,161 42.5,159 42.5,155.5 44,154 63,154 72.5,144.5 72.5,41.5 70,39
24V_IN on Bottom Copper "24V_IN_L02_P061" (solid, pour order 61): 53.5,49 52.5,48 52.5,46.5 54,45 67.5,45 71.5,49 71.5,136 65,142.5 43.5,142.5 42,141 42,138 43.5,136.5 64.5,136.5 68,133 68,52 65,49
GND_IN on Bottom Copper "GND_IN_L02_P063" (solid, pour order 63): 52.5,36 52.5,26.5 56,26.5 56,34.5 56.5,35 53.5,35
+15V_1 on Bottom Copper "+15V_1_L02_P084" (solid, pour order 84): 17,108.5 16.5,108 14.75,108 14.5,108 14,108.5 14,112.5 16,114.5 17,114.5 21.5,119 26,119 28.5,121.5 28.5,126 29,126.5 32.5,126.5 33,126 33,119.5 33.5,119 42.5,119 43,118.5 43,116.5 42.5,116 24,116 21,113 18.189,113 16.997,111.808 17,111.805
-15V_1 on Bottom Copper "-15V_1_L02_P087" (solid, pour order 87): 17.5,109.5 17.5,111.5 18.5,112.5 23,112.5 25.5,115 43,115 44,116 44,119 43,120 38,120 37.5,120.5 37.5,125.5 38,126 43,126 47,122 47,115 44.5,112.5 27,112.5 23.5,109 18,109
+15V_2 on Bottom Copper "Bottom Copper-+15V_2" (solid, pour order 100): 11.5,53.5 20,45 26,45 26.5,44.5 30.5,44.5 34.5,40.5 34.5,37 36,35.5 37,35.5 38,36.5 38,42 35.5,44.5 35.5,47.5 34,49 20.5,49 14,55.5 14,67.5 17,70.5 17,72.5 16.5,73 15,73 11.5,69.5
-15V_2 on Bottom Copper "-15V_2_L02_P101" (solid, pour order 101): 12.5,76 19.5,76 20.5,75 20.5,72.5 20,72 18.5,72 17,73.5 14.5,73.5 10.5,69.5 10.5,52.5 22.5,40.5 33,40.5 33.5,40 33.5,36 33,35.5 23.5,35.5 7.5,51.5 7.5,71
NetD1_2 on Bottom Copper "NETD1_2_L02_P111" (solid, pour order 111): 14,102 14.5,102.5 16.5,102.5 17,102 17,98.5 17.5,98 19.5,98 21,99.5 21,102.5 22.5,104 26,104 26.5,103.5 26.5,99.5 24,99.5 23,98.5 23,96.5 21.5,95 16.5,95 14,97.5
NetD5_2 on Bottom Copper "NETD5_2_L02_P114" (solid, pour order 114): 15,64.5 15.5,65 17,65 17.5,64.5 17.5,61.5 18,61 19.855,61 21.645,62.79 21.645,65.465 22.655,66.475 25.977,66.475 26.566,65.886 26.566,62 24.5,62 23.5,61 23.5,59 22,57.5 18,57.5 15,60.5

## Silkscreen, mask and mechanical layers (free items; w line width, h text height)
Top Overlay:
  lines w0.254: 6.5,178.5 6.5,178.5 ; 77,178.5 77,178.5
  text "GND_IN" at 76.492,164.754 h1.52 r90
  text "24V_IN" at 75.992,123.254 h1.52 r90
Board:
  pour cut-out: 7,1 7,6 ccw(c12,6) 12,1
  lines w0.254: 7,6 ccw(c12,6) 12,1 ; 77.5,6 cw(c72.5,6) 72.5,1 ; 7,173.5 cw(c12,173.5) 12,178.5 ; 7,173.5 7,178.5 12,178.5 ; 7,173.5 7,7.5 7,1 12,1 ; 12,1 72.5,1 ; 12,178.5 72.5,178.5 ; 72.5,1 77.5,1 77.5,7.5 77.5,173.5 ; 72.5,178.5 cw(c72.5,173.5) 77.5,173.5 ; 72.5,178.5 77.5,178.5 77.5,173.5

## Text inside footprints (layer, text, board x,y; h text height)
Serial1: Top Overlay "Serial-Nr." at 28.59,157.31 h1.5; Top Assembly "SerialNr" at 29.5,155.7 h0.7